# EAGLE board prog_board (EAGLE 5.01)
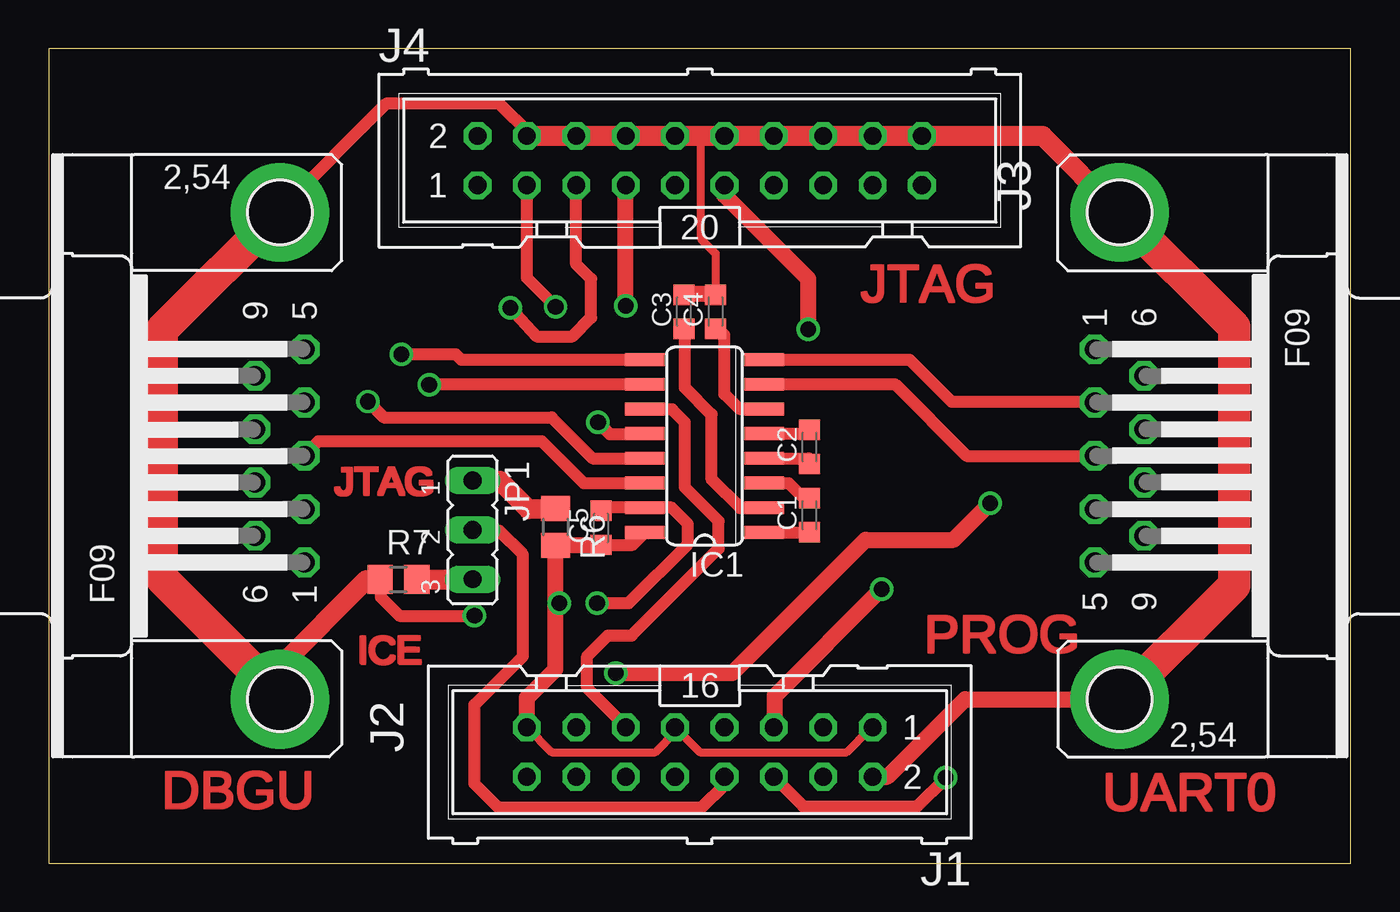
[diagram p0: board, top side]
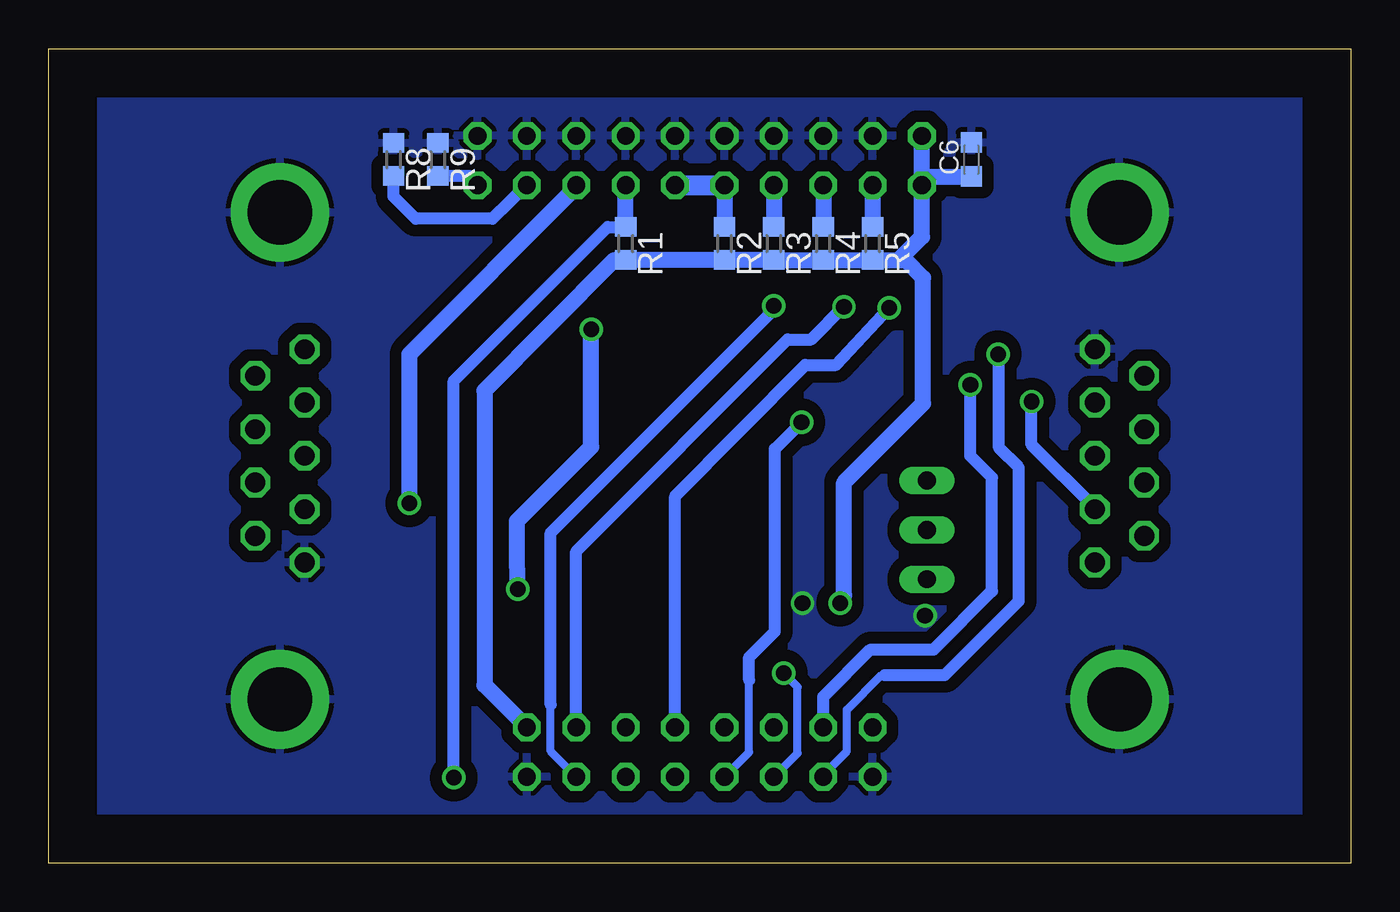
[diagram p1: board, bottom side, seen from below]

Size 66.98 x 41.9 mm. Coordinates in mm from the lower left corner, seen from the top.
Outline: 0,0 66.98,0 66.98,41.9 0,41.9 0,0
Copper layers (1*16): Top 0.035mm / dielectric 1.5mm / Bottom 0.035mm
Design rules "default *": minimum track width 10mil, minimum drill 0.8mm, track to track 0.5mm, track to pad 10mil, pad to pad 0.5mm, via to via 0.5mm, smd to smd 0.5mm, copper to edge 2.5mm, drill to drill 1mm, minimum pad ring 10mil, minimum via ring 8mil, stop-mask expansion 4mil, vias tented up to drill 0mil, thermal gap 10mil

## Footprints (pad centres in the part's own frame; a part is rotated, then mirrored left to right if it is on the bottom)
C0603K = smd 1.05 x 1.08: 1 -0.875,0; 2 0.875,0
SO16 = smd 0.66 x 2.032: 1 -4.445,-3.073; 2 -3.175,-3.073; 3 -1.905,-3.073; 4 -0.635,-3.073; 5 0.635,-3.073; 6 1.905,-3.073; 7 3.175,-3.073; 8 4.445,-3.073; 9 4.445,3.073; 10 3.175,3.073; 11 1.905,3.073; 12 0.635,3.073; 13 -0.635,3.073; 14 -1.905,3.073; 15 -3.175,3.073; 16 -4.445,3.073
ML16 = drill 0.914 octagon: 1 -8.89,-1.27; 2 -8.89,1.27; 3 -6.35,-1.27; 4 -6.35,1.27; 5 -3.81,-1.27; 6 -3.81,1.27; 7 -1.27,-1.27; 8 -1.27,1.27; 9 1.27,-1.27; 10 1.27,1.27; 11 3.81,-1.27; 12 3.81,1.27; 13 6.35,-1.27; 14 6.35,1.27; 15 8.89,-1.27; 16 8.89,1.27
F09HP = drill 1.016 octagon: 1 -5.486,-1.27; 2 -2.743,-1.27; 3 0,-1.27; 4 2.743,-1.27; 5 5.486,-1.27; 6 -4.115,1.27; 7 -1.372,1.27; 8 1.372,1.27; 9 4.115,1.27 | drill 3.302 pad 5.08 round: G1 -12.522,0; G2 12.522,0
ML20 = drill 0.914 octagon: 1 -11.43,-1.27; 2 -11.43,1.27; 3 -8.89,-1.27; 4 -8.89,1.27; 5 -6.35,-1.27; 6 -6.35,1.27; 7 -3.81,-1.27; 8 -3.81,1.27; 9 -1.27,-1.27; 10 -1.27,1.27; 11 1.27,-1.27; 12 1.27,1.27; 13 3.81,-1.27; 14 3.81,1.27; 15 6.35,-1.27; 16 6.35,1.27; 17 8.89,-1.27; 18 8.89,1.27; 19 11.43,-1.27; 20 11.43,1.27
JP2 = drill 0.914 long: 1 -2.54,0; 2 0,0; 3 2.54,0
R0603 = smd 1 x 1.1: 1 -0.85,0; 2 0.85,0
R0805 = smd 1.3 x 1.5: 1 -0.95,0; 2 0.95,0

## Placement (x,y rotation side)
C1  100n  [C0603K]  39.13,17.9 90 top
C2  100n  [C0603K]  39.13,21.41 90 top
C3  100n  [C0603K]  32.68,28.37 90 top
C4  100n  [C0603K]  34.3,28.37 90 top
C5  100n  [C0603K]  28.41,17.24 90 top
C6  100n  [C0603K]  19.52,36.19 90 bottom
IC1  MAX3232CSE  [SO16]  33.74,21.46 90 top
J1  PROG  [ML16]  33.49,5.71 180 top
J2  DBGU  [F09HP]  11.9,20.95 90 top
J3  UART0  [F09HP]  55.08,20.95 270 top
J4  JTAG  [ML20]  33.49,36.14 0 top
JP1  JTAG/ICE  [JP2]  21.81,17.14 270 top
R1  10k  [R0603]  37.3,31.87 270 bottom
R2  10k  [R0603]  32.22,31.87 270 bottom
R3  10k  [R0603]  29.68,31.87 270 bottom
R4  10k  [R0603]  27.14,31.87 270 bottom
R5  10k  [R0603]  24.6,31.87 270 bottom
R6  47k  [R0805]  26.07,17.29 270 top
R7  47k  [R0805]  18,14.6 0 top
R8  10k  [R0603]  49.24,36.19 270 bottom
R9  10k  [R0603]  46.95,36.19 270 bottom

## Library data of the parts
C1-C6 R1-R9 = rcl
IC1 = maxim
J1 J4 = con-harting-ml
J2 J3 = con-subd
JP1 = jumper

## Nets
+3V3: C5.1 C6.1 IC1.16 J1.1 J1.9 J1.15 J4.1 J4.2 R1.2 R2.2 R3.2 R4.2 R5.2 R6.2
BMS/DTXD: IC1.11 J1.11
DRXD: IC1.12 J1.10
GND: C3.2 C4.2 C5.2 C6.2 IC1.15 J1.2 J1.16 J2.5 J2.G1 J2.G2 J3.5 J3.G1 J3.G2 J4.4 J4.6 J4.8 J4.10 J4.12 J4.14 J4.16 J4.18 J4.20 R7.1 R8.1 R9.1
JTAGSEL: J1.8 JP1.2
N$1: JP1.1 R6.1
N$2: JP1.3 R7.2
N$4: J4.17 R8.2
N$5: J4.19 R9.2
N$52: C1.1 IC1.1
N$53: C2.2 IC1.5
N$54: C2.1 IC1.4
N$55: C1.2 IC1.3
N$58: C3.1 IC1.2
N$59: C4.1 IC1.6
NRST: J1.12 J4.15
NTRST: J1.3 J4.3 R5.1
R1IN: IC1.13 J2.2
R2IN: IC1.8 J3.2
RXD0: IC1.9 J1.14
T1OUT: IC1.14 J2.3
T2OUT: IC1.7 J3.3
TCK: J1.5 J4.9 J4.11 R2.1
TDI: J1.7 J4.5 R4.1
TDO: J1.6 J4.13 R1.1
TMS: J1.4 J4.7 R3.1
TXD0: IC1.10 J1.13

## Tracks (layer width: path | path; a pad name or v marks a point on that pad's centre or on a via)
+3V3  (via drill 0.8)
  Top 0.406: J1.15 25.87,5.71 31.2,5.71 32.27,6.78 32.27,6.93 J1.9 33.49,5.71 41.06,5.71 42.23,6.88
  Top 0.61: 28.47,16.3 28.38,16.4 28.42,16.5 C5.1 28.42,16.38 30.04,16.38 IC1.16
  Top 0.813: C5.1 26.31,16.38 R6.2 26.07,13.28 | J1.15 24.6,8.5 26.07,9.98 26.07,13.28 | v26.28,13.38 26.17,13.38 26.07,13.28
  Bottom 0.813: 29.68,30.98 R3.2 32.18,31.02 32.22,30.98 R2.2 37.21,31.02 37.3,31.11 R1.2 37.29,31.01 | 29.68,30.98 29.64,31.02 R4.2 27.14,30.98 27.1,31.02 R5.2 23.27,31.02 22.06,32.23 J4.1 | J4.1 22.06,35.05 21.79,35.32 C6.1 | J4.1 J4.2 | 29.68,30.98 22.9,30.98 22.01,30.09 22.01,23.64 26.07,19.58 26.07,13.79 v26.28,13.38 | J1.1 44.56,9.16 44.56,24.3 37.91,31.01 37.29,31.01 | 37.29,31.01 37.25,31.01
BMS/DTXD
  Top 0.61: J1.11 29.68,7.29 29.43,7.29 27.7,9.01 27.7,10.64 28.77,11.7 29.98,11.7 34.45,16.18 34.45,17.6 32.73,19.32 32.73,22.68 32.07,23.34 30.9,23.34 30.85,23.39 30.82,23.36 IC1.11
DRXD  (via drill 0.8)
  Top 0.61: 30.7,22.07 30.8,22.07 | 30.7,22.07 IC1.12 | v28.26,22.68 28.87,22.07 30.7,22.07
  Bottom 0.406: J1.10 30.95,5.71 30.95,9.42
  Bottom 0.61: 30.95,9.42 30.95,10.59 29.63,11.91 29.63,21.31 v28.26,22.68
GND  (via drill 0.8)
  Top 0.254: 11.9,33.5 J2.G2 | 60.85,14.17 60.52,13.94 60.97,13.86 56.43,10.18 J3.G2
  Top 0.406: 34.09,29.28 34.3,29.5 34.3,31.36 33.54,32.13 33.54,37.41 33.54,37.56
  Top 0.61: IC1.15 30.7,18.28 | C5.2 28.42,18.28 IC1.15 | IC1.15 32.04,18.28 32.88,17.45 32.88,16.43 29.83,13.38 v28.21,13.38 | v21.91,12.72 18.05,12.72 17.08,13.69 17.08,14.4 17.05,14.43 R7.1 | 12,33.7 17.39,39.09 23.18,39.09 24.75,37.51 24.65,37.41 J4.4
  Top 0.813: C4.2 34.09,29.28 32.79,29.28 C3.2 | 55.1,8.43 J3.G2 47.13,8.43 43.14,4.44 42.58,4.44 42.48,4.34 J1.2 | 11.9,33.6 12,33.7
  Top 1.016: R7.1 16.34,14.56 11.9,10.13 J2.G1 | J4.6 27.24,37.46 | J4.4 J4.6 | J4.6 J4.8 J4.10 33.54,37.41 J4.12 | J4.12 34.86,37.46 | J4.12 J4.14 J4.16 J4.18 J4.20 51.12,37.41 55.08,33.45
  Top 1.676: J2.G1 12,8.53 12,8.61 10.78,9.67 5.8,14.65 5.8,27.43 5.96,27.55 11.9,33.5 11.9,33.6 | 55.08,33.45 J3.G1 | 55.1,8.43 60.85,14.17 60.97,14.29 60.97,27.58 55.26,33.29 55.23,33.29
  pour Bottom (isolate 0.61): -0.04,41.83 67.07,41.83 67.07,-0.13 -0.09,-0.13 -0.09,41.63
JTAGSEL
  Top 0.61: JP1.2 21.86,17.09 23.18,17.09 24.4,15.87 24.4,10.64 21.91,8.15 21.91,4.08 23.13,2.86 33.59,2.86 34.76,4.03 J1.8 34.76,4.39 34.81,4.34
N$1
  Top 1.016: R6.1 24.67,18.22 23.2,19.68 JP1.1
N$2
  Top 1.016: R7.2 JP1.3
N$4
  Bottom 0.61: J4.17 44.16,33.14 48.09,33.14 49.24,34.29 R8.2
N$5
  Bottom 0.61: R9.2 45.34,35.34 J4.19
N$52
  Top 0.61: C1.1 39.33,17.01 IC1.1
N$53
  Top 0.61: C2.2 39.33,22.35 39,22.09 IC1.5
N$54
  Top 0.61: C2.1 39.09,20.82 IC1.4
N$55
  Top 0.61: IC1.3 38.06,19.55 38.82,18.79 39.33,18.79 C1.2
N$58
  Top 0.61: C3.1 32.72,27.45 32.73,27.45 32.73,24.45 34.1,23.08 34.1,19.73 35.57,18.26 36.84,18.26 IC1.2
N$59
  Top 0.61: C4.1 34.51,27.43 34.76,27.17 34.76,24.12 35.52,23.36 IC1.6
NRST  (via drill 0.8)
  Top 0.813: v29.17,9.77 35.17,9.77 42.02,16.63 46.55,16.63 v48.42,18.51
  Bottom 0.406: J1.12 28.46,5.66 28.46,9.06 v29.17,9.77
  Bottom 0.813: J4.15 39.84,34.77 48.42,26.18 v48.42,18.51
NTRST  (via drill 0.8)
  Top 0.61: v26.07,28.62 24.6,30.09 J4.3
  Bottom 0.61: J1.3 39.84,16.02 28.97,26.94 27.75,26.94 v26.07,28.62
  Bottom 0.813: J4.3 24.47,34.92 24.6,34.79 R5.1
R1IN  (via drill 0.8)
  Top 0.61: IC1.13 27.98,20.82 25.87,22.93 17.23,22.93 v16.42,23.74
  Bottom 0.61: J2.2 13.12,18.21 16.42,21.51 v16.42,23.74
R2IN
  Top 0.61: IC1.8 44.28,25.9 46.44,23.74 53.68,23.74 53.73,23.69 J3.2
RXD0  (via drill 0.8)
  Top 0.61: IC1.9 21.22,25.9 20.94,26.18 v18.15,26.18
  Bottom 0.406: J1.14 27.14,4.54 25.92,5.76 25.92,7.89 24.14,9.67 23.99,9.67
  Bottom 0.61: 23.99,9.67 20.89,9.67 17.08,13.48 17.08,20.34 18.1,21.36 18.1,26.13 v18.15,26.18
T1OUT
  Top 0.61: IC1.14 27.52,19.55 25.36,21.71 13.88,21.71 13.12,20.95 | 13.07,20.9 13.12,20.95 | 13.12,20.95 J2.3
T2OUT
  Top 0.61: IC1.7 43.52,24.63 47.21,20.95 J3.3
TCK  (via drill 0.8)
  Top 0.813: J4.11 34.76,34.36 39.08,30.04 v39.08,27.45 | v42.84,14.09 37.35,8.61 37.35,7.13 37.3,7.08 J1.5
  Bottom 0.813: J4.9 R2.1 | v39.08,27.45 39.08,21.41 42.89,17.6 42.89,15.51 v42.84,14.09
  Bottom 1.016: J4.11 J4.9
TDI  (via drill 0.8)
  Top 0.61: v23.74,28.57 25.11,27.1 26.94,27.1 27.9,28.06 27.9,30.04 27.14,30.8 J4.5
  Bottom 0.61: J1.7 34.76,18.87 28.05,25.62 26.48,25.62 v23.74,28.57
  Bottom 0.813: J4.5 R4.1
TDO  (via drill 0.8)
  Top 0.61: v46.14,4.39 44.67,2.92 38.82,2.92 J1.6
  Bottom 0.61: R1.1 38.23,32.72 46.14,24.81 v46.14,4.39
  Bottom 0.813: 37.3,35.05 J4.13 R1.1
TMS  (via drill 0.8)
  Top 0.813: v29.68,28.67 J4.7
  Bottom 0.406: J1.4 41.16,5.76 41.16,8.15
  Bottom 0.61: 41.16,8.15 41.16,16.99 29.73,28.42 v29.68,28.67
  Bottom 0.813: J4.7 R3.1
TXD0  (via drill 0.8)
  Top 0.61: IC1.10 19.6,24.63 v19.57,24.61
  Bottom 0.61: v19.57,24.61 19.57,20.95 18.45,19.83 18.45,13.99 21.45,10.99 24.7,10.99 27.14,8.55 27.14,7.13 27.29,6.98 | 27.29,6.98 27.34,6.93 | J1.13 27.29,6.98

## Text on the board
Top: JTAG | JTAG | JTAG | JTAG | JTAG | JTAG | JTAG | JTAG | JTAG | JTAG | JTAG | JTAG | JTAG | JTAG | JTAG | JTAG | JTAG | JTAG | JTAG | JTAG | JTAG | JTAG | ICE | ICE | ICE | ICE | ICE | ICE | ICE | ICE | ICE | ICE | ICE | PROG | PROG | PROG | PROG | PROG | PROG | PROG | DBGU | DBGU | DBGU | DBGU | DBGU | DBGU | DBGU | UART0 | UART0 | UART0 | UART0 | UART0 | UART0 | UART0 | UART0